# Altium PCB Board.PcbDoc
Units mil, origin at the board's own origin, x right, y up, seen from the top; angles counter-clockwise.
Board outline 6000 x 4000 mil, 2 copper layers (Top Layer, Bottom Layer); 30 components, 31 nets, 101 pads, 18 vias.
Unrouted connection lines stored in the file: 1.
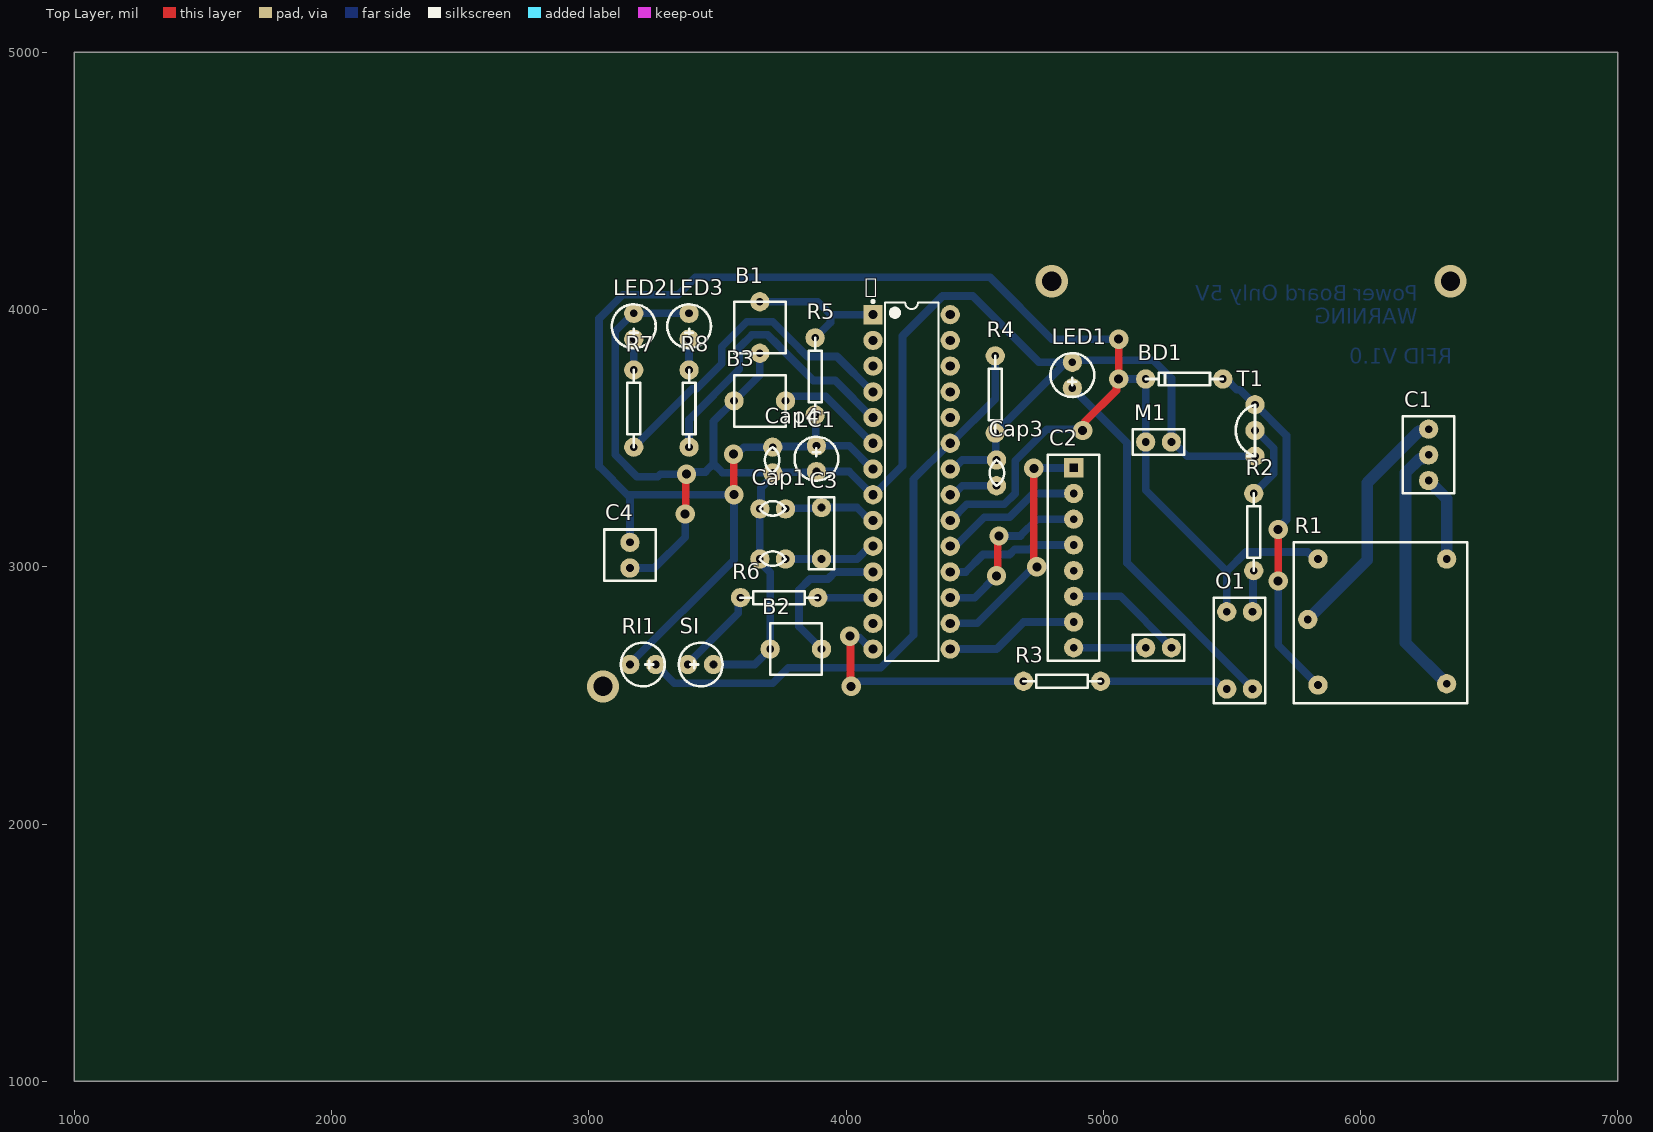
[diagram p0: Top Layer view]
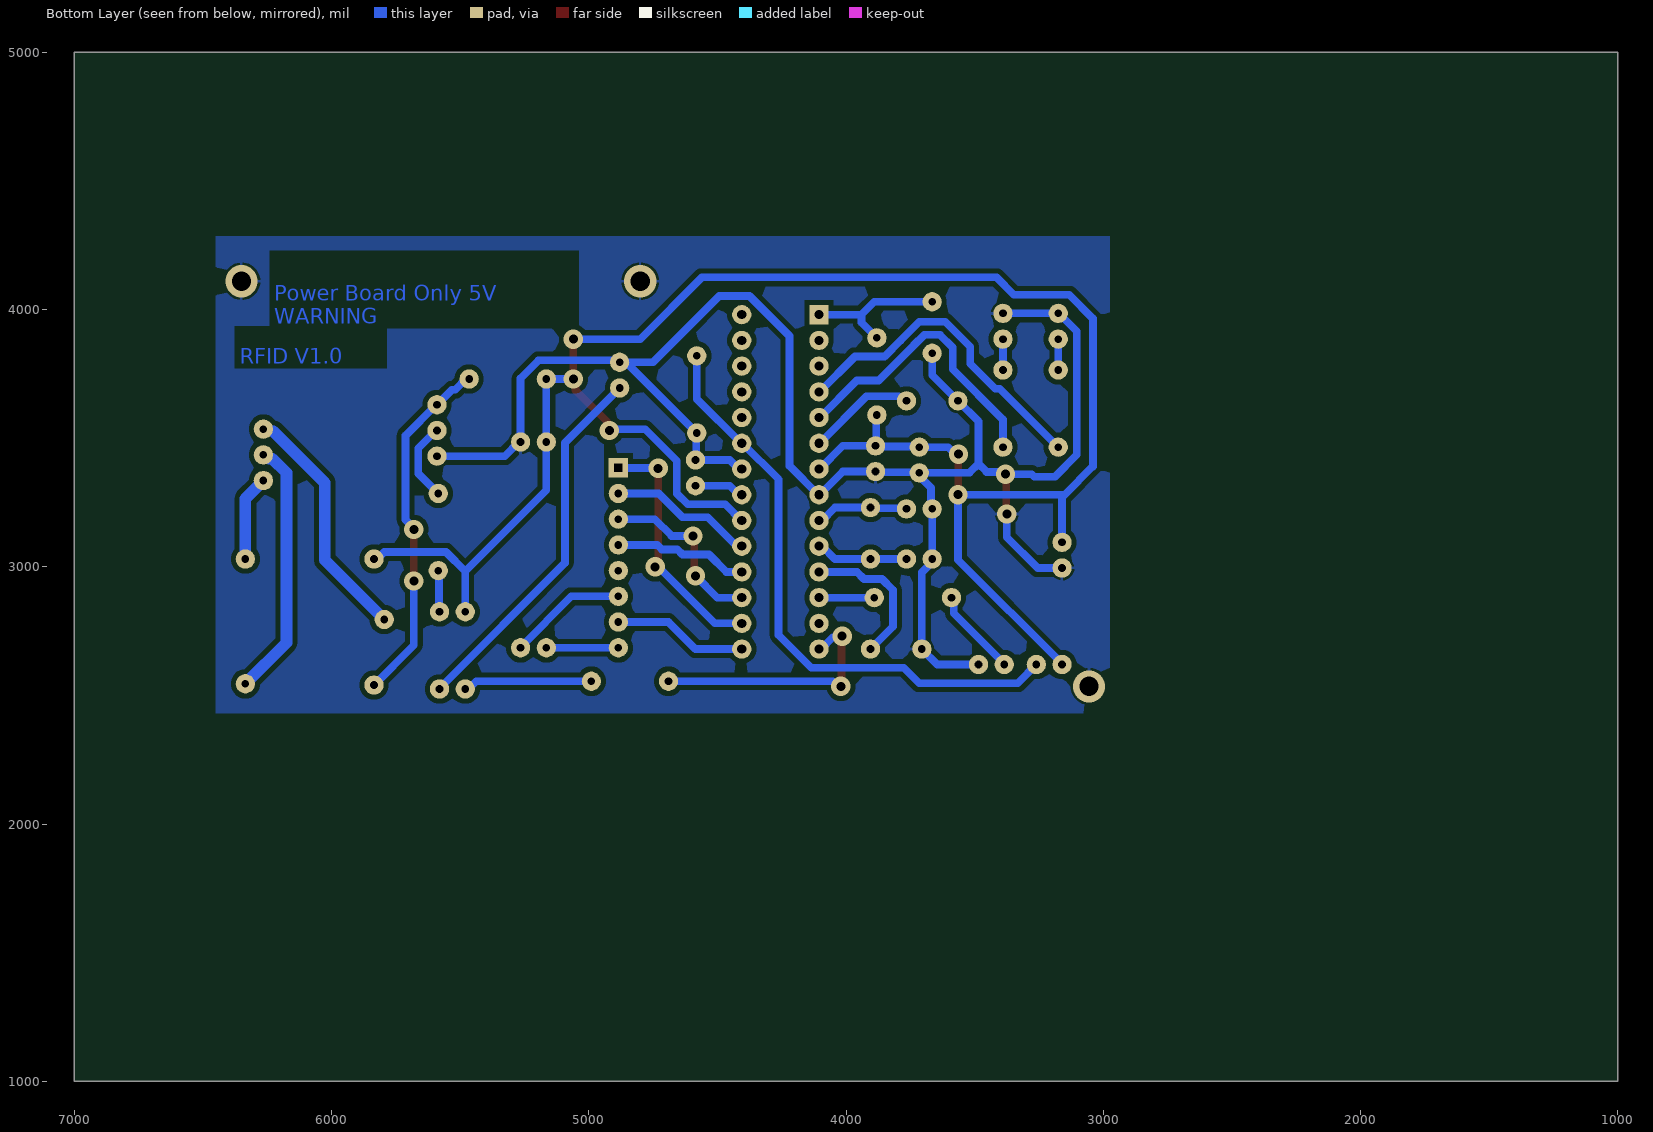
[diagram p1: Bottom Layer view, seen from below]

## Layer stack, top to bottom
Top Solder: solder mask 0.4, Solder Resist, Dk 3.5
Top Layer: signal copper 1.4
Dielectric 1: dielectric 12.6, FR-4, Dk 4.8
Bottom Layer: signal copper 1.4
Bottom Solder: solder mask 0.4, Solder Resist, Dk 3.5

## Board outline
1000,1000 7000,1000 7000,5000 1000,5000

## Design rules (kind name [scope] priority, off if disabled: settings)
Clearance [All] p1: gap=20 ignorepadtopadclearanceinfootprint=FALSE except(0: Arc-Hole Track-Hole SMDPad-Hole THPad-Hole Via-Hole Fill-Hole Poly-Hole Region-Hole Text-Hole)
PolygonConnect [All] p1: connectstyle=Relief reliefconductorwidth=10 reliefentries=4 polygonreliefangle="90 Angle" airgapwidth=10
RoutingVias [All] p1: holewidth=28 width=50 viastyle="Through Hole" minholewidth=28 minwidth=50 maxholewidth=28 maxwidth=50
SolderMaskExpansion [All] p1: expansion=4 istentingtop=FALSE
Width [All] p1: maxlimit=60 minlimit=25 preferedwidth=30
30 further rules are at their usual default settings.

## Classes and differential pairs
component class Board: B1 B2 B3 BD1 C1 C2 C3 C4 Cap1 Cap3 Cap4 LC1 LED1 LED2 LED3 M1 O1 R1 R2 R3 R4 R5 R6 R7 R8 RI1 SI T1

## Components (designator, comment, footprint, x,y, rotation, side; value= is the part's Value field where it differs from the comment)
 "ATmega8 +5v Deep" 28P3 4255.15,3330 r0 top (schematic designator U1)
B1 "Button" Button 3665,3930 r0 top
B2 "Button Add" Button 3805,2680 r90 top
B3 "Button Remove" Button 3665,3645 r90 top
BD1 "Bridge Diode" "Bridge Diode" 5315,3730 r270 top
C1 "Connector 3Pin" "Connector 3Pin" 6265,3435 r0 top
C2 "Connector 3Pin" "Connector 8Pin" 4885,3035 r0 top
C3 "16mhz" "Crystal 16mhz" 3905,3130 r0 top
C4 "VIN" "Connector 2Pin" 3160,3045 r180 top
Cap1 "104" Capacitor 3715,3225 r90 top
Cap2 "104" Capacitor 3715,3030 r90 top
Cap3 "100n" Capacitor 4585,3365 r0 top
Cap4 "100n" Capacitor 3715,3415 r180 top
LC1 "10uf" "Electrolytic Capacitor" 3885,3420 r180 top
LED1 "GER" LED 4880,3745 r0 top
LED2 "LED RE" LED 3175,3935 r0 top
LED3 "LED GE" LED 3390,3935 r0 top
M1 "5V TO 3.3V" "5V TO 3V" 5215,3095 r0 top
O1 "Optocopler" Optocopler 5530,2645 r180 top
R1 "Relay" Relay 6090,2795 r0 top
R2 "550Ohm" Resistor 5585,3135 r180 top
R3 "220Ohm" Resistor 4840,2555 r90 top
R4 "10K" Resistor 4580,3670 r0 top
R5 "10K" Resistor 3880,3740 r0 top
R6 "220Ohm" Resistor 3740,2880 r90 top
R7 "220Ohm" Resistor 3175,3615 r0 top
R8 "220Ohm" Resistor 3390,3615 r0 top
RI1 "Receive infrared" LED 3210,2620 r90 top
SI "Send infrared" LED 3435,2620 r270 top
T1 "2N2222" Transistor 5590,3530 r180 top

## Footprints (in the part's own frame and the unit in brackets; to place one, negate y for a bottom-side part, rotate by r counter-clockwise, add the part's x,y. Pads: shape width x height; smd on the part's side, far side on the other; paste and mask are expansions set on the pad)
"5V TO 3V" [mil]
  round 75 hole 30: 1(-50,390) 2(50,390) 3(-50,-410) 4(50,-410)
  silkscreen extent -100,-460 100,440
28P3 [mil] "DIP, 28-Leads, Row Spacing 7.62mm, Pitch 2.54mm, Body 34.67x7.3mm"
  rect 75x75 hole 35.43: 1(-150,650)
  round 75 hole 35.43: 2(-150,550) 3(-150,450) 4(-150,350) 5(-150,250) 6(-150,150) 7(-150,50) 8(-150,-50) 9(-150,-150) 10(-150,-250) 11(-150,-350) 12(-150,-450) 13(-150,-550) 14(-150,-650) 15(150,-650) 16(150,-550) 17(150,-450) 18(150,-350) 19(150,-250) 20(150,-150) 21(150,-50) 22(150,50) 23(150,150) 24(150,250) 25(150,350) 26(150,450) 27(150,550) 28(150,650)
  silkscreen extent -155,-697 104,706, body extent -142,-695 142,695, height 180
"Bridge Diode" [mil]
  round 75 hole 30: 1(0,150) 2(0,-150)
  silkscreen extent -25,-150 25,150
Button [mil]
  round 75 hole 30: 1(0,100) 2(0,-100)
  silkscreen extent -100,-100 100,100
Capacitor [mil]
  round 75 hole 30: 1(0,50) 2(0,-50)
  silkscreen extent -26,-50 30,50
"Connector 2Pin" [mil]
  round 75 hole 30: 1(0,50) 2(0,-50)
  silkscreen extent -100,-100 100,100
"Connector 3Pin" [mil]
  round 75 hole 30: 1(0,100) 2(0,0) 3(0,-100)
  silkscreen extent -100,-150 100,150
"Connector 8Pin" [mil]
  rect 75x75 hole 30 square: 1(0,350)
  round 75 hole 30: 2(0,250) 3(0,150) 4(0,50) 5(0,-50) 6(0,-150) 7(0,-250) 8(0,-350)
  silkscreen extent -100,-400 100,400
"Crystal 16mhz" [mil]
  round 75 hole 30: 1(0,100) 2(0,-100)
  silkscreen extent -50,-140 50,140
"Electrolytic Capacitor" [mil]
  round 75 hole 30: 1(0,50) 2(0,-50)
  silkscreen extent -85,-85 85,85
LED [mil]
  round 75 hole 30: 1(0,50) 2(0,-50)
  silkscreen extent -85,-85 85,85
Optocopler [mil]
  round 75 hole 30: 1(50,120) 2(-50,120) 3(-50,-180) 4(50,-180)
  silkscreen extent -100,-235 100,175
Relay [mil]
  round 75 hole 30: 1(-255,235) 2(-255,-255) 3(-295,0) 4(245,235) 5(245,-250)
  silkscreen extent -350,-325 325,300
Resistor [mil]
  round 75 hole 30: 1(0,150) 2(0,-150)
  silkscreen extent -25,-150 25,150
Transistor [mil]
  round 75 hole 30: 1(0,100) 2(0,0) 3(0,-100)
  silkscreen extent 0,-100 75,100

## Part data
: library part ATmega8L-8PI, "8-Bit AVR Microcontroller with 8K Bytes of In-System Programmable Flash Memory", Supplier Part Number 1=ATMEGA8L-8PI-ND, ComponentLink1Description=Datasheet, ComponentLink1URL=http://www.atmel.com/dyn/resources/prod_documents/doc2486.pdf, ComponentLink2Description="Atmel.com Home", ComponentLink2URL=http://www.atmel.com, DatasheetVersion=2486H-AVR-09/02, PackageDescription="28-lead (0.300\"/7.62mm Wide) Plastic Dual Inline Package (PDIP)", PackageReference=28P3, PackageVersion="revB, Sep-2001", Published=17-Sep-2003, Publisher="Altium Limited", Supplier 1=Digi-Key, Supplier 2=Farnell, Supplier 3=Mouser, Supplier Part Number 2=3917940, Supplier Part Number 3=556-ATMEGA8L-8PI
B2 B3: library part Button
C2: library part "Connector 8Pin"
C3: library part "Crystal 16mhz"
C4: library part "Connector 2Pin"
Cap1 Cap2 Cap3 Cap4: library part Capacitor
LC1: library part "Electrolytic Capacitor"
LED1 LED2 LED3 RI1 SI: library part LED
R2 R3 R4 R5 R6 R7 R8: library part Resistor
T1: library part Transistor

## Via types
v1: diameter 75, hole 35, Top Layer to Bottom Layer, 15 vias
v2: diameter 125, hole 75, Top Layer to Bottom Layer, 3 vias

## Nets (pads, with @x,y where several pads share a name; then routed paths per layer and width w, separated by ;. In a path a pad name is that pad's centre, name@x,y a point inside that pad or via, vN(x,y) a via of type N, cw(c..) or ccw(c..) an arc to the next point about the centre after c; other vN are vias at no path point)
+5: .7 .20 BD1.2 C4.2 Cap4.2 LC1.2 M1.1 O1.4 R1.1 R5.2 RI1.1 | length 7911.2
  Top Layer w30: v1(3562.91,3437.5) 3563.96,3436.46 3563.96,3281.04 v1(3565,3280) ; v1(4920,3530) 4928.61,3538.61 4928.61,3563.61 5051.39,3686.39 5051.39,3721.39 v1(5060,3730) v1(5060,3885)
  Bottom Layer w30: RI1.1 3160,2622.53 3565,3027.53 v1(3565,3280) 3150,3280 ; C4.2 3160,3270 3150,3280 ; v1(3562.91,3437.5) 3575.09,3437.5 3602.59,3465 Cap4.2 3717.5,3467.5 3882.5,3467.5 LC1.2 ; R5.2 3882.5,3587.5 3882.5,3472.5 LC1.2 ; .7 4102.62,3380 4012.62,3470 LC1.2 ; .20 4407.68,3180 4470.18,3242.5 4615.03,3242.5 4657.5,3284.97 4657.5,3345.03 4657.46,3345.07 4657.46,3384.93 4657.5,3384.97 4657.5,3412.57 4779.93,3535 4915,3535 v1(4920,3530) ; v1(5060,3730) BD1.2 M1.1 5165,3297.53 5480,2982.53 ; v1(5060,3885) 4800,3885 4560,4125 3415,4125 3347.5,4057.5 3132.5,4057.5 3040,3965 3040,3390 3150,3280 ; O1.4 5480,2982.53 ; R1.1 5822.82,3030 5795.32,3057.5 5554.97,3057.5 5480,2982.53
GND: .8 .22 B1.2 B2.1 B3.1 C4.1 Cap1.1 Cap2.1 Cap3.1 Cap4.1 LC1.1 LED1.1 LED2.1 LED3.1 M1.2 R4.2 SI.1 T1.1 | length 7129.6
  Top Layer w30: v1(3375,3205) 3377.5,3207.5 3377.5,3357.5 v1(3380,3360)
  Bottom Layer w30: C4.1 3255,2995 3375,3115 v1(3375,3205) ; LED3.1 LED2.1 3172.47,3985 3102.5,3915.03 3102.5,3434.97 3187.47,3350 3268.34,3350 3278.34,3360 v1(3380,3360) 3388.61,3368.61 3453.46,3368.61 3485,3400.15 ; SI.1 3645,2620 B2.1 3705,2977.82 3665,3017.82 Cap2.1 Cap1.1 3669.68,3229.68 3669.68,3307.5 3715,3352.82 Cap4.1 ; B1.2 3665,3745 B3.1 3485,3565 3485,3400.15 ; .22@4413.76,3371.39 .22 4417.32,3380 4452.32,3415 Cap3.1 4582.5,3417.5 4582.5,3517.5 R4.2 4846.39,3786.39 4871.39,3786.39 LED1.1 ; T1.1 5326.67,3430 5271.67,3485 M1.2 5265,3732.53 5195.03,3802.5 4887.5,3802.5 LED1.1 ; 3485,3400.15 3520.15,3365 Cap4.1 ; Cap4.1 3717.5,3367.5 3882.5,3367.5 LC1.1 4012.62,3370 4102.62,3280 .8 4107.68,3280 4219.81,3392.13 4219.81,3897.19 4375.12,4052.5 4492.72,4052.5 4750.22,3795 LED1.1
  other v2: 3055,2535 4800,4110 6350,4110
Input: C1.1 R1.3 | length 952.3
  Bottom Layer w30: 6226.39,3526.39 6256.39,3526.39 C1.1
  Bottom Layer w45: R1.3 6026.32,3026.32 6026.32,3326.32 6226.39,3526.39
NetB1_1: .1 B1.1 R5.1 | length 544.2
  Bottom Layer w30: B1.1@3700,4030 3890,4030 3940,3980 ; R5.1 3940,3950 3940,3980 ; .1@4102.65,3982.5 .1 3940,3980
NetB2_2: .11 B2.2 | length 582.9
  Bottom Layer w30: B2.2 3817.5,2767.5 3817.5,2910.03 3859.97,2952.5 3930.03,2952.5 3957.53,2980 .11
NetB3_2: .6 B3.2 | length 423
  Bottom Layer w30: B3.2 3777.18,3645 3794.68,3662.5 3920.12,3662.5 4102.62,3480 .6
NetBD1_1: BD1.1 R1.2 T1.3 | length 1386.3
  Top Layer w30: v1(5680,2945) v1(5680,3145)
  Bottom Layer w30: BD1.1 5477.18,3730 5518.84,3688.34 5531.66,3688.34 T1.3 5592.53,3630 5712.5,3510.03 5712.5,3182.91 5680,3150.41 v1(5680,3145) ; v1(5680,2945) 5680,2695 R1.2
NetC1_2: C1.2 R1.5 | length 1005.3
  Bottom Layer w45: C1.2 6256.88,3435 6241.88,3420 6230,3420 6175,3365 6175,2705 R1.5
NetC1_3: C1.3 R1.4 | length 334
  Bottom Layer w45: C1.3 6335,3265 R1.4
NetC2_1: .16 C2.1 | length 971.1
  Top Layer w30: v1(4729.96,3382.5) 4730.2,3382.26 4730.2,3023.34 4741.61,3011.93 v1(4741.61,2999.75)
  Bottom Layer w30: .16 4510.46,2780 4730.21,2999.75 v1(4741.61,2999.75) ; v1(4729.96,3382.5) 4731.21,3383.75 4883.75,3383.75 C2.1
NetC2_2: .19 C2.2 | length 564.8
  Bottom Layer w30: .19 4410.71,3085.56 4430.56,3085.56 4537.5,3192.5 4635.74,3192.5 4728.24,3285 C2.2
NetC2_3: .17 C2.3 | length 691.1
  Top Layer w30: v1(4585,2965) 4590,2970 4590,3115 v1(4595,3120)
  Bottom Layer w30: .17 4500,2880 v1(4585,2965) ; v1(4595,3120) 4677.95,3120 4742.95,3185 C2.3
NetC2_4: .18 C2.4 | length 523.3
  Bottom Layer w30: .18 4465,2980 4532.5,3047.5 4635.74,3047.5 4655.74,3067.5 4715.8,3067.5 4733.3,3085 C2.4
NetC2_6: C2.6 M1.4 | length 464.3
  Bottom Layer w30: C2.6 5067.53,2885 5265,2687.53 M1.4
NetC2_7: .15 C2.7 | length 523.3
  Bottom Layer w30: .15 4585,2680 4690,2785 C2.7
NetC2_8: C2.8 M1.3 | length 280
  Bottom Layer w30: C2.8 M1.3
NetC3_1: .9 C3.1 Cap1.2 | length 362.9
  Bottom Layer w30: Cap1.2 3767.5,3227.5 3902.5,3227.5 C3.1 4042.97,3230 4092.97,3180 .9
NetC3_2: .10 C3.2 Cap2.2 | length 360.9
  Bottom Layer w30: Cap2.2 C3.2 4042.97,3030 4092.97,3080 .10
NetCap3_2: .21 Cap3.2 | length 194.4
  Bottom Layer w30: .21 4417.32,3280 4452.32,3315 Cap3.2
NetLED1_2: LED1.2 O1.2 | length 1459.9
  Bottom Layer w30: LED1.2 5092.5,3482.5 5092.5,3015.03 5580,2527.53 O1.2
NetLED2_2: LED2.2 R7.1 | length 120
  Bottom Layer w30: R7.1 LED2.2
NetLED3_2: LED3.2 R8.1 | length 120
  Bottom Layer w30: R8.1 LED3.2
NetO1_1: O1.1 R3.2 | length 506
  Bottom Layer w30: R3.2 5437.82,2555 5467.82,2525 O1.1 O1.1@5477.5,2527.5
NetO1_3: O1.3 R2.1 | length 162.1
  Bottom Layer w30: O1.3 5582.5,2827.5 5582.5,2982.5 R2.1
NetR3_1: .14 R3.1 | length 989.6
  Top Layer w30: v1(4015,2730) 4017.5,2727.5 4017.5,2537.5 v1(4020,2535)
  Bottom Layer w30: v1(4015,2730) 4018.83,2726.17 4051.11,2726.17 4097.28,2680 .14 .14@4107.57,2677.57 ; v1(4020,2535) 4032.18,2535 4052.18,2555 R3.1
NetR4_1: .23 R4.1 RI1.2 | length 2329.8
  Bottom Layer w30: RI1.2 3332.5,2547.5 3715.07,2547.5 3775.07,2607.5 4135.18,2607.5 4262.18,2734.5 4262.18,3339.56 4402.62,3480 .23 4407.68,3480 4580,3652.32 R4.1
NetR6_1: R6.1 SI.2 | length 344.9
  Bottom Layer w30: SI.2 3385,2622.53 3581.39,2818.92 3581.39,2871.39 R6.1
NetR6_2: .12 R6.2 | length 215.1
  Bottom Layer w30: R6.2 .12
NetR7_2: .4 R7.2 | length 1283.9
  Bottom Layer w30: R7.2 3402.5,3692.5 3420.03,3692.5 3517.14,3789.61 3517.14,3855.39 3614.26,3952.5 3715.74,3952.5 3787.5,3880.74 3787.5,3879.97 3849.97,3817.5 3965.12,3817.5 4102.62,3680 .4
NetR8_2: .5 R8.2 | length 1143.2
  Bottom Layer w30: R8.2 3390,3572.53 3585,3767.53 3585,3852.53 3634.97,3902.5 3695.03,3902.5 3737.5,3860.03 3737.5,3859.26 3872.82,3723.93 3958.68,3723.93 4102.62,3580 .5
OptocoplerNet1: R2.2 T1.2 | length 308.6
  Bottom Layer w30: R2.2 5662.5,3362.5 5662.5,3460.03 5592.53,3530 T1.2
pads on no net: .2 .3 .13 .24 .25 .26 .27 .28 C2.5

## Polygon pours and split planes (outlines as drawn)
GND on Bottom Layer "GND_L02_P000" (solid, pour order 0): 6450,4285 2975,4285 2975,2430 6450,2430

## Other copper
Bottom Layer:
  text "Power Board Only 5V / WARNING" at 6222.37,3945 h60
  text "RFID V1.0" at 6357.5,3790 h60